# Altium PCB Sheet1.PcbDoc
Units mm, origin at the board's own origin, x right, y up, seen from the top; angles counter-clockwise.
Board outline 64.26 x 58.22 mm, 2 copper layers (Top Layer, Bottom Layer); 40 components, 36 nets, 240 pads, 0 vias.
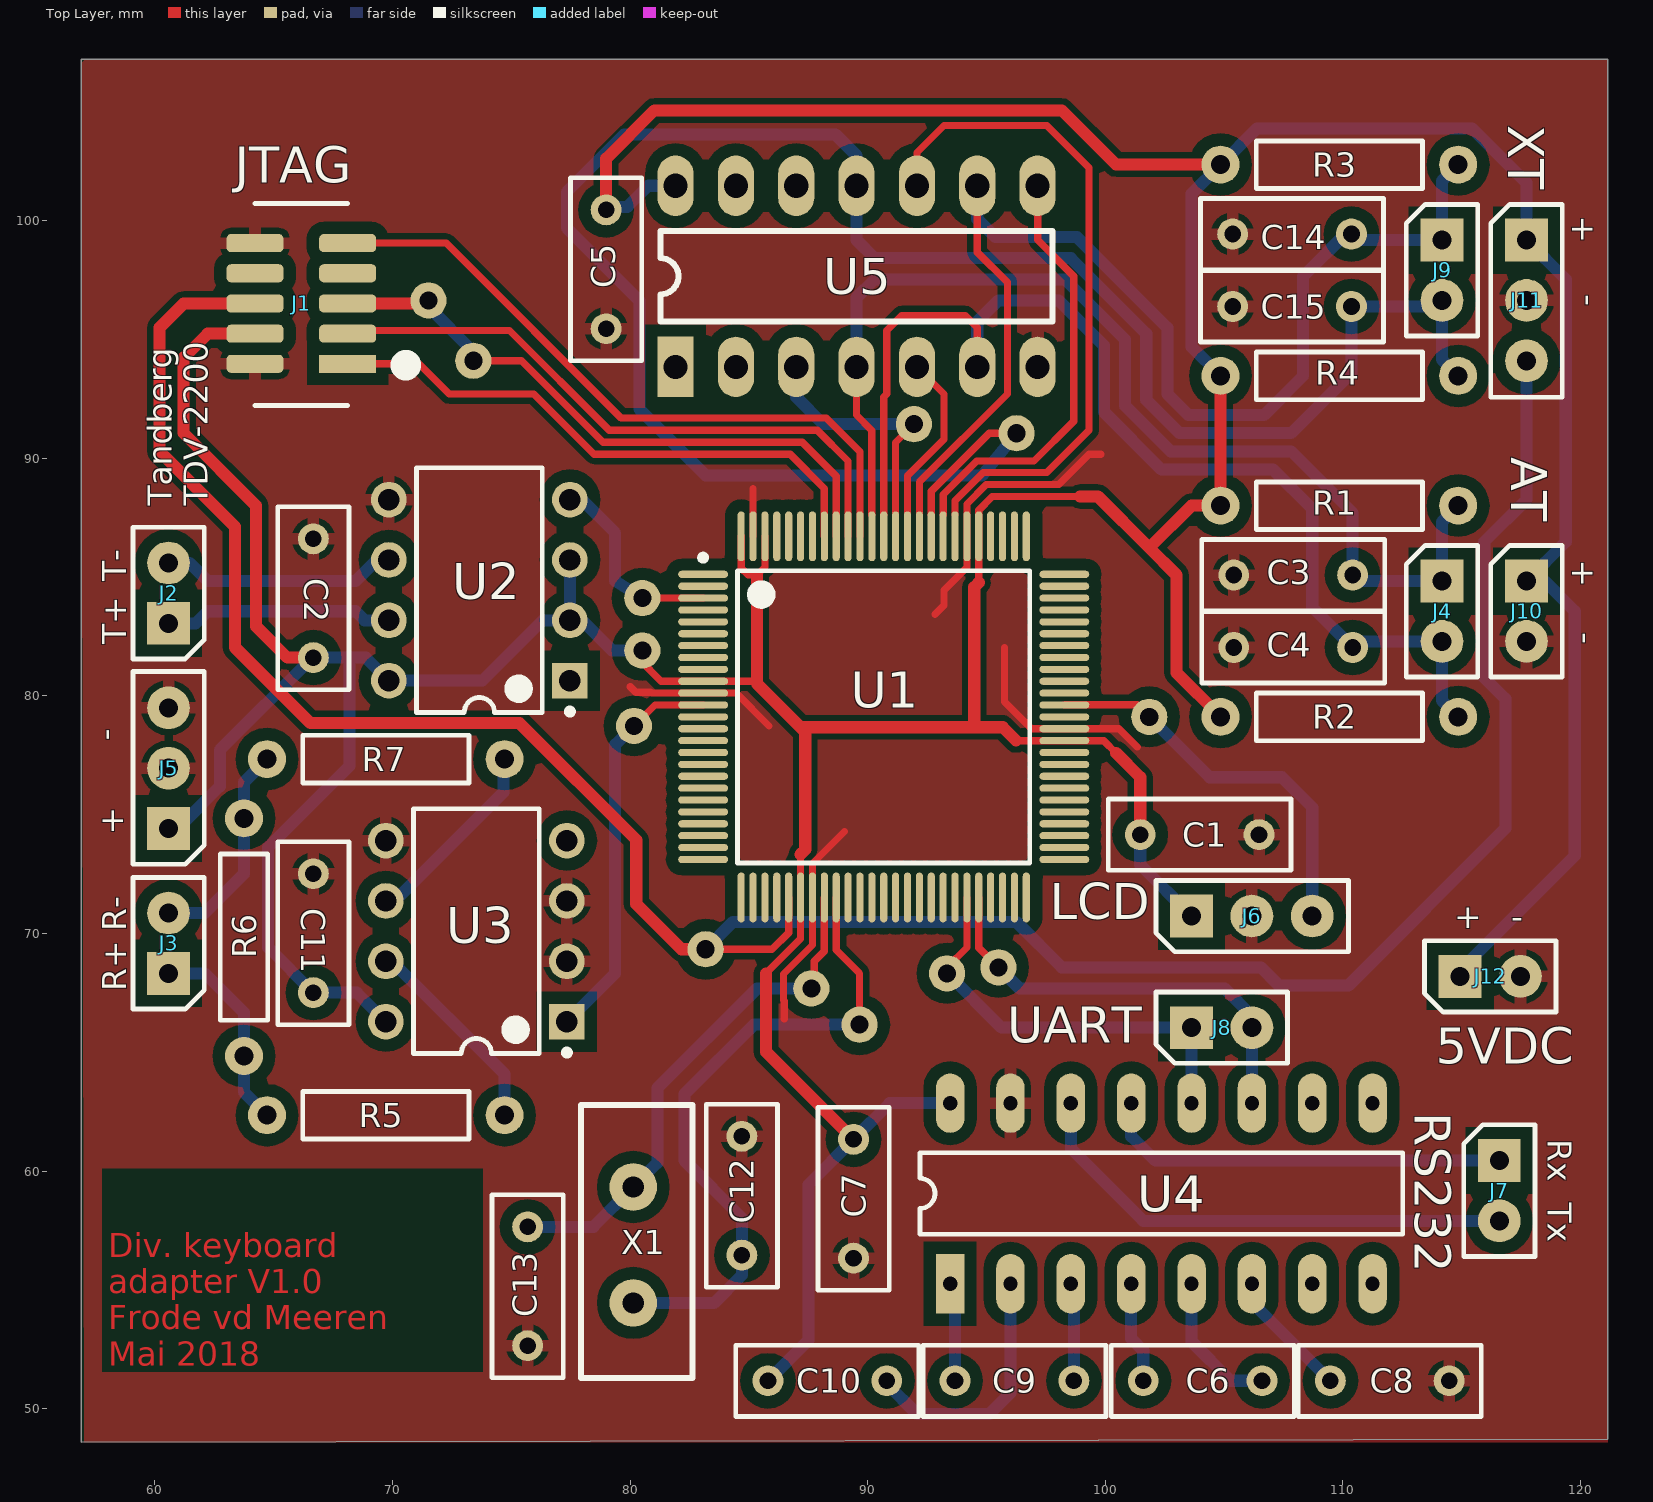
[diagram p0: Top Layer view]
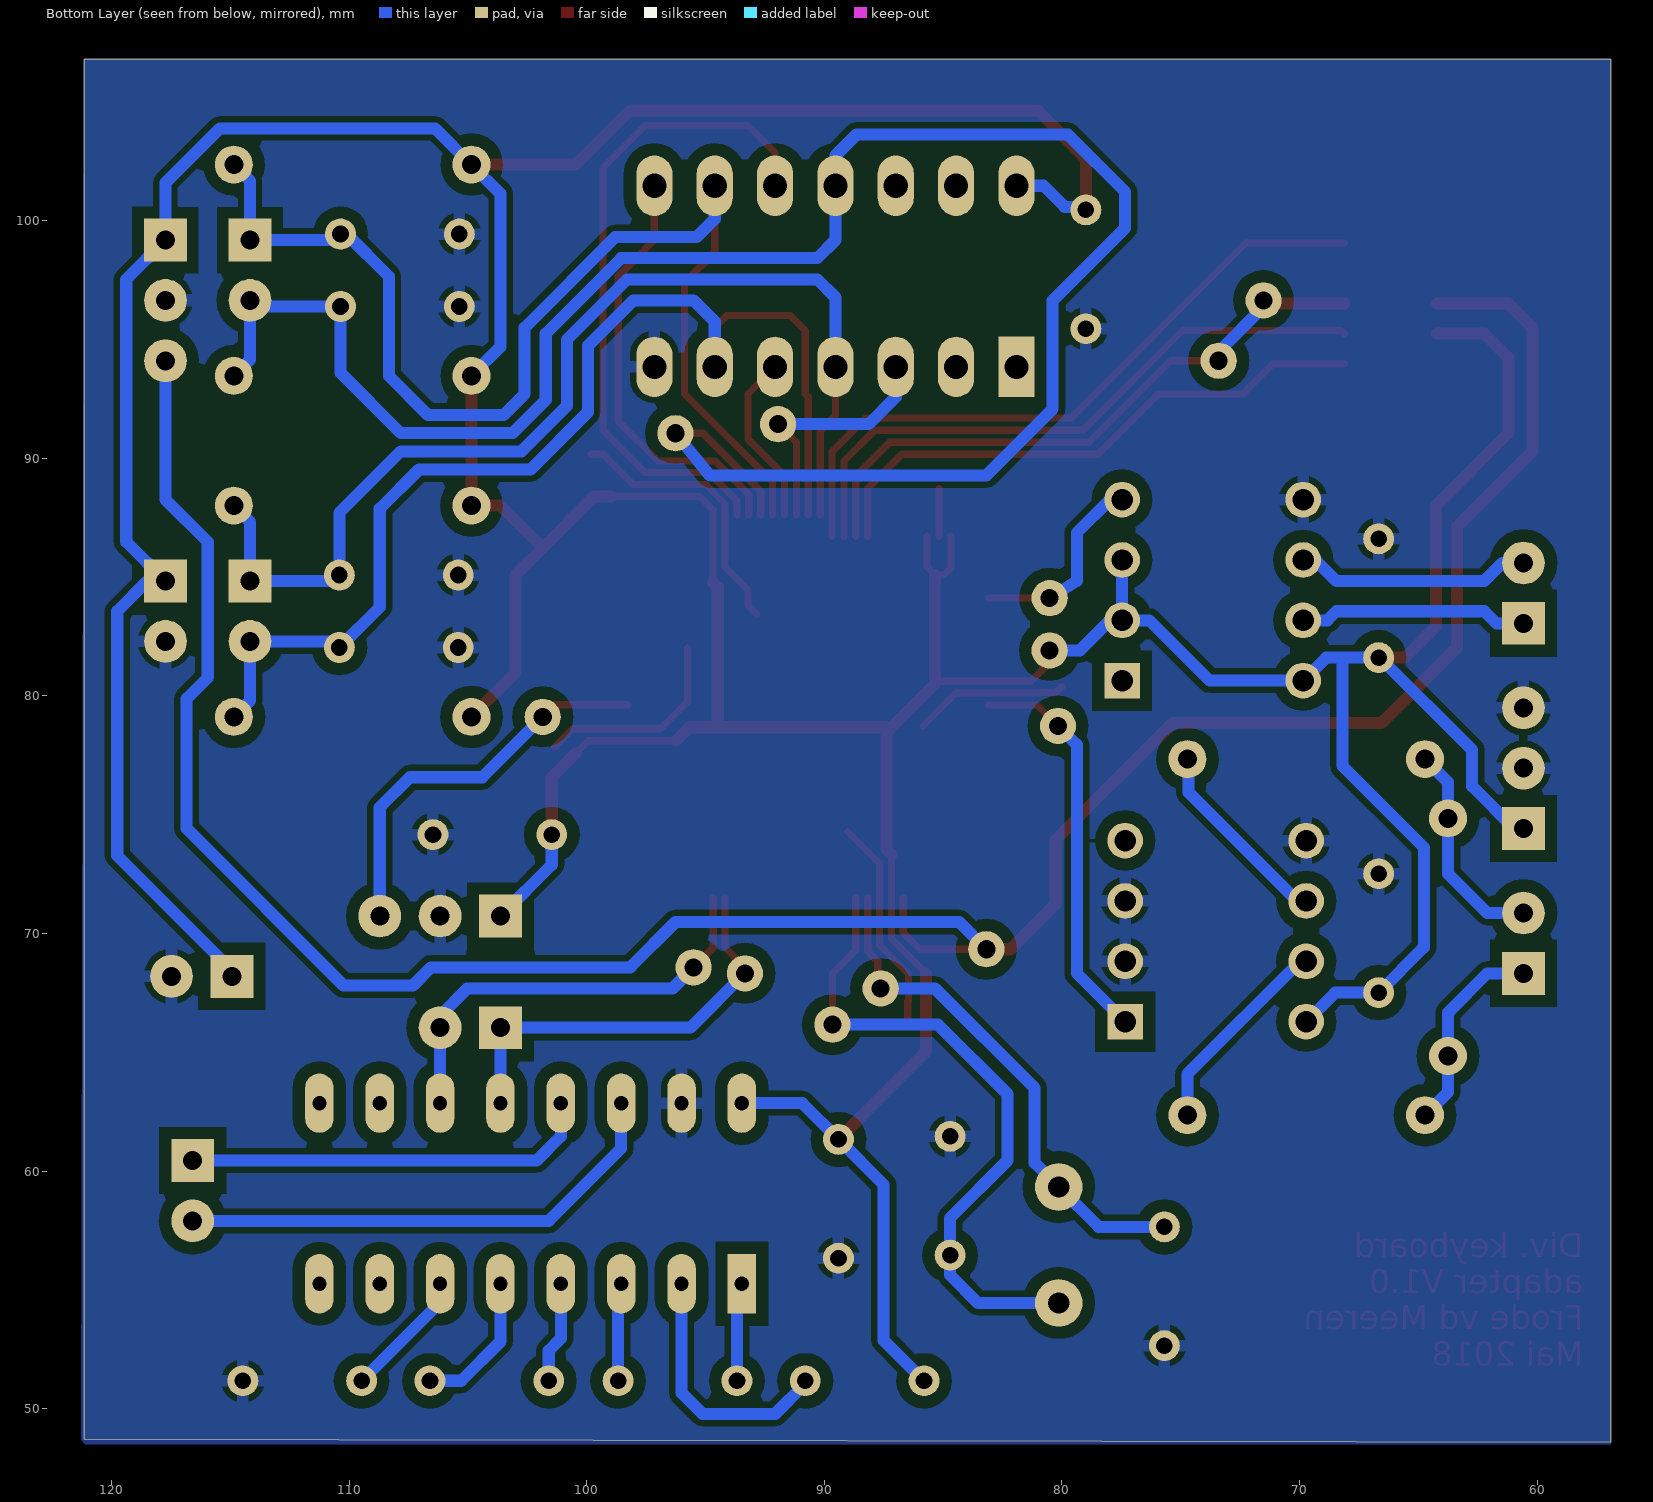
[diagram p1: Bottom Layer view, seen from below]
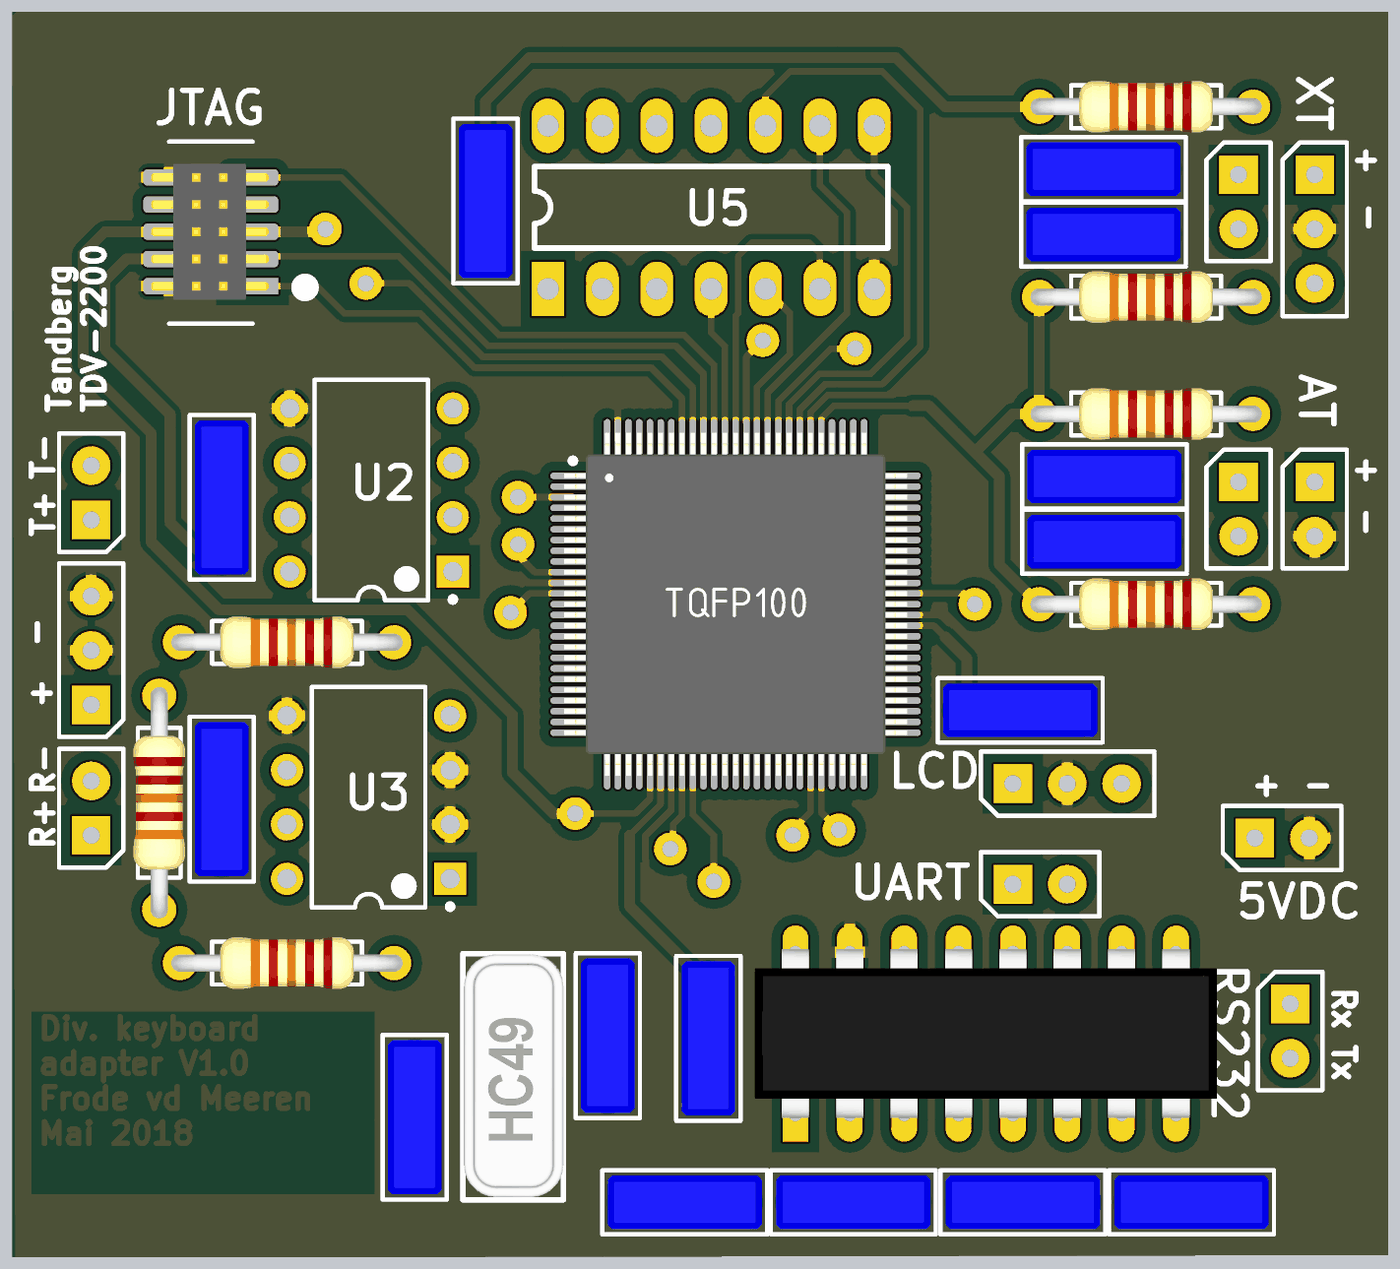
[diagram p2: 3D render of the assembled board from above, using the file's embedded part models]

## Layer stack, top to bottom
Top Solder: solder mask 0.0102, Solder Resist, Dk 3.5
Top Layer: signal copper 0.0356
Dielectric 1: dielectric 0.32, FR-4, Dk 4.8
Bottom Layer: signal copper 0.0356
Bottom Solder: solder mask 0.0102, Solder Resist, Dk 3.5

## Board outline
121.158,106.807 56.896,106.807 56.896,48.585 121.158,48.718

## Design rules (kind name [scope] priority, off if disabled: settings)
Clearance [All] p1: gap=0.254 ignorepadtopadclearanceinfootprint=FALSE except(0: Arc-Hole Track-Hole SMDPad-Hole THPad-Hole Via-Hole Fill-Hole Poly-Hole Region-Hole Text-Hole; 0.025: Track-Track Track-SMDPad SMDPad-SMDPad; 0.508: SMDPad-Poly THPad-Poly)
PolygonConnect [All] p1: connectstyle=Relief reliefconductorwidth=0.508 reliefentries=4 polygonreliefangle="90 Angle" airgapwidth=0.254
RoomDefinition Sheet1 [InComponentClass('Sheet1')] p1: confinementstyle=ConfineIn formatcopy=TRUE lockcomponents=FALSE outline 0,0 50.8,0 50.8,25.4 0,25.4
RoutingVias [All] p1: holewidth=0.711 width=1.27 viastyle="Through Hole" minholewidth=0.711 minwidth=1.27 maxholewidth=0.711 maxwidth=1.27
SolderMaskExpansion [All] p1: expansion=0.102
Width [All] p1: maxlimit=2.54 minlimit=0.305 preferedwidth=0.305
30 further rules are at their usual default settings.

## Components (designator, comment, footprint, x,y, rotation, side; value= is the part's Value field where it differs from the comment)
C1 "100nF" CAPAR500W50L730T250H650 106.473,74.168 r180 top
C2 "100nF" CAPAR500W50L730T250H650 66.675,86.614 r270 top
C3 "47pF" CAPAR500W50L730T250H650 105.41,85.09 r0 top
C4 "47pF" CAPAR500W50L730T250H650 105.41,82.042 r0 top
C5 "100nF" CAPAR500W50L730T250H650 78.994,95.457 r90 top
C6 "100nF" CAPAR500W50L730T250H650 101.6,51.181 r0 top
C7 "100nF" CAPAR500W50L730T250H650 89.408,56.341 r90 top
C8 "100nF" CAPAR500W50L730T250H650 109.474,51.181 r0 top
C9 "100nF" CAPAR500W50L730T250H650 93.679,51.181 r0 top
C10 "100nF" CAPAR500W50L730T250H650 85.805,51.181 r0 top
C11 "100nF" CAPAR500W50L730T250H650 66.675,72.517 r270 top
C12 "22pF" CAPAR500W50L730T250H650 84.709,56.468 r90 top
C13 "22pF" CAPAR500W50L730T250H650 75.692,57.658 r270 top
C14 "47pF" CAPAR500W50L730T250H650 105.363,99.441 r0 top
C15 "47pF" CAPAR500W50L730T250H650 105.363,96.393 r0 top
J1 "Header SMD 127 2x5" SMDHDRV10P127_2X5_615X330X560B 66.167,96.52 r180 top
J2 "Header 1x2" HDRV2W64P254_1X2_508X254X900B 60.579,85.598 r180 top
J3 "Header 1x2" HDRV2W64P254_1X2_508X254X900B 60.579,70.866 r180 top
J4 "Header 1x2" HDRV2W64P254_1X2_508X254X900B 114.173,82.296 r0 top
J5 "Header1x3" HDRV3W64P254_1X3_762X254X900B 60.579,76.962 r180 top
J6 "Header1x3" HDRV3W64P254_1X3_762X254X900B 106.172,70.739 r90 top
J7 "Header 1x2" HDRV2W64P254_1X2_508X254X900B 116.586,57.912 r0 top
J8 "Header 1x2" HDRV2W64P254_1X2_508X254X900B 106.172,66.04 r90 top
J9 "Header 1x2" HDRV2W64P254_1X2_508X254X900B 114.173,96.647 r0 top
J10 "Header 1x2" HDRV2W64P254_1X2_508X254X900B 117.729,82.296 r0 top
J11 "Header1x3" HDRV3W64P254_1X3_762X254X900B 117.729,96.647 r0 top
J12 "Header 1x2" HDRV2W64P254_1X2_508X254X900B 117.475,68.199 r90 top
R1 "10k" RESA_0.25W 109.855,88.011 r180 top
R2 "10k" RESA_0.25W 109.855,79.121 r180 top
R3 "10k" RESA_0.25W 109.855,102.362 r180 top
R4 "10k" RESA_0.25W 109.855,93.472 r180 top
R5 "1500" RESA_0.25W 69.723,62.357 r180 top
R6 "220" RESA_0.25W 63.754,69.85 r270 top
R7 "1500" RESA_0.25W 69.723,77.343 r180 top
U1 "ATMEGA640_1280_2560" TQFP100_M 90.678,79.121 r0 top
U2 "MAX485" DIP-8 73.66,84.455 r180 top
U3 "MAX485" DIP-8 73.533,70.104 r180 top
U4 "MAX232A" CircuitWorks-DIP16 93.472,55.265 r90 top
U5 "74LS07" DIP14 89.535,97.663 r90 top
X1 "Krystalloscillator" CrystalTH 80.137,56.896 r90 top

## Footprints (in the part's own frame and the unit in brackets; to place one, negate y for a bottom-side part, rotate by r counter-clockwise, add the part's x,y. Pads: shape width x height; smd on the part's side, far side on the other; paste and mask are expansions set on the pad)
CAPAR500W50L730T250H650 [mm] "Lead Spacing=5.0mm, Lead Width=0.5mm, Body Length=7.3mm, Body thickness=2.5mm, Body Height=6.5mm"
  round 1.3 hole 0.7: 1(0,0) 2(5,0)
  silkscreen extent -1.35,-1.5 6.35,1.5, body extent -1.1,-1.25 6.1,1.25, height 6.5
CircuitWorks-DIP16 [mm]
  rect 2.5x1.2 hole 0.6: 1(0,0)
  oval 2.5x1.2 hole 0.6: 2(0,-2.54) 3(0,-5.08) 4(0,-7.62) 5(0,-10.16) 6(0,-12.7) 7(0,-15.24) 8(0,-17.78) 9(7.6,-17.78) 10(7.6,-15.24) 11(7.6,-12.7) 12(7.6,-10.16) 13(7.6,-7.62) 14(7.6,-5.08) 15(7.6,-2.54) 16(7.6,0)
  silkscreen extent 2.08,-19.05 5.52,1.27, body extent -0.13,-19.68 7.75,1.91, height 4.19
CrystalTH [mm] "CrystalTH"
  round 2 hole 0.9: 1(-2.44,0) 2(2.44,0)
  silkscreen extent -5.6,-2.5 5.9,2.2, body extent -5.47,-2.5 5.87,2.15, height 3.6
DIP14 [mil]
  rect 100x60 hole 40: 1(-150,300)
  oval 100x60 hole 40: 2(-150,200) 3(-150,100) 4(-150,0) 5(-150,-100) 6(-150,-200) 7(-150,-300) 8(150,-300) 9(150,-200) 10(150,-100) 11(150,0) 12(150,100) 13(150,200) 14(150,300)
  silkscreen extent -75,-325 75,325
DIP-8 [mm] "DIP; 8 Leads; Row Spacing 7.62 mm; Pitch 2.54 mm"
  rect 1.5x1.5 hole 0.9: 1(-3.81,3.81)
  round 1.5 hole 0.9: 2(-3.81,1.27) 3(-3.81,-1.27) 4(-3.81,-3.81) 5(3.81,-3.81) 6(3.81,-1.27) 7(3.81,1.27) 8(3.81,3.81)
  silkscreen extent -3.94,-5.15 2.65,5.23, body extent -3.6,-5.15 3.6,5.15, height 5.08
HDRV2W64P254_1X2_508X254X900B [mm] "Header 1x2"
  rect 1.8x1.8 hole 0.8: 1(0,2.54)
  round 1.8 hole 0.8: 2(0,0)
  silkscreen extent -1.5,-1.5 1.5,4.04
HDRV3W64P254_1X3_762X254X900B [mm] "Header 1x3"
  rect 1.8x1.8 hole 0.8: 1(0,2.54)
  round 1.8 hole 0.8: 2(0,0) 3(0,-2.54)
  silkscreen extent -1.5,-4.07 1.5,4.04
RESA_0.25W [mm]
  round 1.6 hole 0.8: 1(-5,0) 2(5,0)
  silkscreen extent -3.5,-1 3.5,1, body extent -5.4,-1.2 5.4,1.2, height 2.6
SMDHDRV10P127_2X5_615X330X560B [mm] "SMD 2X5 Vertical Header"
  rect 2.4x0.76 smd: 1(-1.95,2.54)
  rrect50% 2.4x0.76 smd: 2(1.95,2.54) 3(-1.95,1.27) 4(1.95,1.27) 5(-1.95,0) 6(1.95,0) 7(-1.95,-1.27) 8(1.95,-1.27) 9(-1.95,-2.54) 10(1.95,-2.54)
  silkscreen extent -4.54,-4.21 1.95,4.29, body extent -2.7,-3.18 2.8,3.17, height 4.5
TQFP100_M [mm]
  oval 2.1x0.3 smd: 1(-7.6,6) 2(-7.6,5.5) 3(-7.6,5) 4(-7.6,4.5) 5(-7.6,4) 6(-7.6,3.5) 7(-7.6,3) 8(-7.6,2.5) 9(-7.6,2) 10(-7.6,1.5) 11(-7.6,1) 12(-7.6,0.5) 13(-7.6,0) 14(-7.6,-0.5) 15(-7.6,-1) 16(-7.6,-1.5) 17(-7.6,-2) 18(-7.6,-2.5) 19(-7.6,-3) 20(-7.6,-3.5) 21(-7.6,-4) 22(-7.6,-4.5) 23(-7.6,-5) 24(-7.6,-5.5) 25(-7.6,-6) 51(7.6,-6) 52(7.6,-5.5) 53(7.6,-5) 54(7.6,-4.5) 55(7.6,-4) 56(7.6,-3.5) 57(7.6,-3) 58(7.6,-2.5) 59(7.6,-2) 60(7.6,-1.5) 61(7.6,-1) 62(7.6,-0.5) 63(7.6,0) 64(7.6,0.5) 65(7.6,1) 66(7.6,1.5) 67(7.6,2) 68(7.6,2.5) 69(7.6,3) 70(7.6,3.5) 71(7.6,4) 72(7.6,4.5) 73(7.6,5) 74(7.6,5.5) 75(7.6,6)
  oval 0.3x2.1 smd: 26(-6,-7.6) 27(-5.5,-7.6) 28(-5,-7.6) 29(-4.5,-7.6) 30(-4,-7.6) 31(-3.5,-7.6) 32(-3,-7.6) 33(-2.5,-7.6) 34(-2,-7.6) 35(-1.5,-7.6) 36(-1,-7.6) 37(-0.5,-7.6) 38(0,-7.6) 39(0.5,-7.6) 40(1,-7.6) 41(1.5,-7.6) 42(2,-7.6) 43(2.5,-7.6) 44(3,-7.6) 45(3.5,-7.6) 46(4,-7.6) 47(4.5,-7.6) 48(5,-7.6) 49(5.5,-7.6) 50(6,-7.6) 76(6,7.6) 77(5.5,7.6) 78(5,7.6) 79(4.5,7.6) 80(4,7.6) 81(3.5,7.6) 82(3,7.6) 83(2.5,7.6) 84(2,7.6) 85(1.5,7.6) 86(1,7.6) 87(0.5,7.6) 88(0,7.6) 89(-0.5,7.6) 90(-1,7.6) 91(-1.5,7.6) 92(-2,7.6) 93(-2.5,7.6) 94(-3,7.6) 95(-3.5,7.6) 96(-4,7.6) 97(-4.5,7.6) 98(-5,7.6) 99(-5.5,7.6) 100(-6,7.6)
  silkscreen extent -7.72,-6.15 6.15,6.82, body extent -8.01,-8.01 8.01,8.01, height 1.1

## Part data
C1 C2 C3 C4 C5 C6 C7 C8 C9 C10 C11 C12 C13 C14 C15: library part 3269, "100V plast", antall=200, dybde=1, hylle=4, id=3269, kolonne=0, lager_type=Fremlager, leverandor=Farnell, leverandor_varenr=2525325, pakke_opprettet="16.11.2016 21:11:30", pakke_opprettet_av=1335, pakketype=TH, pris=2, rad=12, rom=OV, symbol_opprettet="14.11.2014 20:19:34", symbol_opprettet_av=815
  C1 C2 C5 C6 C7 C8 C9 C10 C11: navn=100nF
  C3 C4 C14 C15: navn=47pF
  C12 C13: navn=22pF
J1: library part 2449, antall=55, beskrivelse="1,27mm Pitch SMD Header", dybde=0, hylle=6, id=2449, kolonne=0, lager_type=Fremlager, navn="Header SMD 127 2x5", nokkelord=JTAG, pakke_opprettet="15.11.2014 18:30:38", pakke_opprettet_av=815, pakketype=SMD, pris=20, rad=4, rom=OV, symbol_opprettet="15.11.2014 18:33:29", symbol_opprettet_av=815
J2 J3 J4 J7 J8 J9 J10 J12: library part 2429, beskrivelse="2,54mm pitch", id=2429, navn="Header 1x2", pakke_opprettet="13.11.2014 12:30:48", pakke_opprettet_av=815, pakketype=TH, pris=1, symbol_opprettet="13.11.2014 10:58:53", symbol_opprettet_av=815
J5 J6 J11: library part 2430, beskrivelse="2,54mm pitch", id=2430, navn="Header 1x3", pakke_opprettet="13.11.2014 12:31:03", pakke_opprettet_av=815, pakketype=TH, pris=2, symbol_opprettet="13.11.2014 10:59:05", symbol_opprettet_av=815
R1 R2 R3 R4 R5 R6 R7: library part 2807, "0.25W 1% Generic resistor", antall=250, dybde=16, hylle=0, id=2807, kolonne=0, lager_type=Baklager, nokkelord="Motstand, Resistor", pakke_opprettet="28.06.2014 17:13:33", pakke_opprettet_av=815, pakketype=TH, pris=0, rad=14, rom=GM, symbol_opprettet="08.07.2014 21:16:33", symbol_opprettet_av=815
  R1 R2 R3 R4: navn=10k
  R5 R7: navn=1500
  R6: navn=220
U2 U3: library part 3048, "3.3V-Powered, 10Mbps and Slew-Rate-Limited True RS-485/RS-422 Transceivers", antall=40, dybde=0, hylle=2, id=3048, kolonne=4, lager_type=Fremlager, leverandor=Farnell, leverandor_varenr=1296640, navn=MAX485, nokkelord=RS485, pakke_opprettet="28.06.2014 18:39:37", pakke_opprettet_av=815, pakketype=SOIC, pris=22, produsent=Exar, rad=4, rom=OV, symbol_opprettet="07.05.2015 21:29:51", symbol_opprettet_av=815
U4: library part 2080, "rs232 -> ttl converter", id=2080, navn=MAX232A, pakke_opprettet="25.08.2016 00:00:22", pakke_opprettet_av=1607, pakketype=DIP, pris=5, symbol_opprettet="14.09.2016 15:58:47", symbol_opprettet_av=1154
U5: library part 74LS04
X1: library part 3915, "4MHz", antall=30, dybde=0, hylle=7, id=3915, lager_type=Fremlager, navn=Krystalloscillator, nokkelord="krystall, crystal, oscillator", pakke_opprettet="29.01.2017 21:01:52", pakke_opprettet_av=1150, pakketype=TH, pris=2, rad=0, rom=OV, symbol_opprettet="23.08.2014 20:23:20", symbol_opprettet_av=774

## Free pads (board coordinates)
  round 1.524 hole 0.762: 2(87.63,67.691) 3(89.662,66.167) 4(101.854,79.121) 5(93.345,68.326) 6(95.504,68.58) 7(80.168,78.74) 8(80.518,84.121) 14(91.948,91.44) 15(96.266,91.059) 16(73.406,94.107) 17(71.519,96.647) 18(83.185,69.342) 20(80.518,81.915)

## Nets (pads, with @x,y where several pads share a name; then routed paths per layer and width w, separated by ;. In a path a pad name is that pad's centre, name@x,y a point inside that pad or via, vN(x,y) a via of type N, cw(c..) or ccw(c..) an arc to the next point about the centre after c; other vN are vias at no path point)
GND: C1.1 C2.1 C3.1 C4.1 C5.1 C7.1 C8.2 C11.1 C12.2 C13.2 C14.1 C15.1 J1.2 J1.10 J5.2 J5.3 J6.2 J10.2 J11.2 J12.2 U1.11 U1.32 U1.62 U1.81 U1.99 U2.5 U3.2 U3.3 U3.5 U4.15 U5.7 | length 37.9
  Top Layer w0.305: 80.01,80.391 80.239,80.162 80.864,80.162 80.905,80.121 U1.11 84.471,80.121 85.852,78.74 ; U1.99 85.178,88.734 ; 86.487,66.421 86.487,67.156 86.462,67.182 86.462,68.301 87.678,69.517 U1.32 87.678,72.946 89.027,74.295 ; 92.837,83.439 93.218,83.82 93.218,84.455 94.178,85.415 U1.81 94.178,88.082 94.996,88.9 98.044,88.9 99.314,90.17 99.822,90.17 ; 95.758,82.042 95.758,79.756 96.893,78.621 U1.62 100.576,78.621 101.346,77.851
NetC3_2: C3.2 J4.1 R1.1 U1.89 U5.4 | length 46.3
  Top Layer w0.305: U5.4@89.535,94.107 U5.4 89.535,91.821 90.178,91.178 U1.89@90.178,87.63
  Bottom Layer w0.508: U5.4@89.535,94.107 89.535,96.774 90.297,97.536 98.298,97.536 100.838,94.996 100.838,92.202 102.743,90.297 107.823,90.297 110.41,87.71 C3.2 110.664,84.836 J4.1 114.173,87.329 R1.1
NetC4_2: C4.2 J4.2 R2.1 U1.88 U5.6 | length 48.7
  Top Layer w0.305: U1.88@90.678,87.63 90.678,92.583 90.805,92.71 90.805,95.377 91.44,96.012 94.107,96.012 94.615,95.504 U5.6@94.615,94.107
  Bottom Layer w0.508: U5.6@94.615,94.107 94.615,95.758 95.504,96.647 98.044,96.647 99.949,94.742 99.949,91.948 102.362,89.535 107.061,89.535 108.712,87.884 108.712,83.74 C4.2 110.664,82.296 J4.2 114.173,79.803 R2.1
NetC6_1: C6.1 U4.4 | length 4.3
  Bottom Layer w0.508: U4.4 101.092,52.959 101.6,52.451 C6.1
NetC6_2: C6.2 U4.5 | length 6.1
  Bottom Layer w0.508: U4.5 103.632,52.832 105.283,51.181 C6.2
NetC8_1: C8.1 U4.6 | length 5.5
  Bottom Layer w0.508: U4.6 106.172,54.483 C8.1
NetC9_1: C9.1 U4.1 | length 4.2
  Bottom Layer w0.508: U4.1 93.679,55.058 C9.1
NetC9_2: C9.2 U4.3 | length 4.1
  Bottom Layer w0.508: U4.3 98.679,55.138 C9.2
NetC10_2: C10.2 U4.2 | length 10.8
  Bottom Layer w0.508: C10.2 90.805,51.054 92.075,49.784 95.123,49.784 96.012,50.673 U4.2
NetC12_1: C12.1 pad.3 U1.34 X1.1 | length 28
  Top Layer w0.305: U1.34 88.678,69.31 89.662,68.326 pad.3
  Bottom Layer w0.508: X1.1 83.539,54.456 84.709,55.626 C12.1 84.709,58.039 82.296,60.452 82.296,63.246 85.217,66.167 pad.3
NetC13_1: C13.1 pad.2 U1.33 X1.2 | length 22
  Top Layer w0.305: pad.2 87.757,67.818 87.757,68.834 88.178,69.255 U1.33
  Bottom Layer w0.508: C13.1 78.459,57.658 X1.2 81.153,60.352 81.153,63.5 85.344,67.691 pad.2
NetC14_2: C14.2 J9.1 R3.1 U1.85 U5.9 | length 51.6
  Top Layer w0.305: U1.85@92.178,87.63 92.178,89.003 95.885,92.71 95.885,97.409 94.615,98.679 U5.9 U5.9@94.615,101.727
  Bottom Layer w0.508: U5.9@94.615,101.727 U5.9 94.615,100.076 95.377,99.314 98.806,99.314 102.616,95.504 102.616,92.71 103.505,91.821 106.68,91.821 108.331,93.472 108.331,97.663 110.109,99.441 C14.2 110.617,99.187 J9.1 114.173,101.68 R3.1
NetC15_2: C15.2 J9.2 pad.15 R4.1 U1.84 U5.11 | length 88
  Top Layer w0.305: U1.84@92.678,87.63 92.678,88.614 95.123,91.059 pad.15
  Bottom Layer w0.508: pad.15 94.82,89.281 83.185,89.281 80.391,92.075 80.391,96.647 77.343,99.695 77.343,101.219 79.756,103.632 88.646,103.632 89.535,102.743 U5.11 89.535,99.187 90.297,98.425 98.552,98.425 101.727,95.25 101.727,92.456 103.124,91.059 107.823,91.059 110.363,93.599 C15.2 113.919,96.393 J9.2 114.173,94.154 R4.1
NetJ1_1: J1.1 U1.93 | length 24.2
  Top Layer w0.305: J1.1 71.12,93.98 72.39,92.71 75.946,92.71 78.486,90.17 86.741,90.17 88.178,88.733 U1.93
NetJ1_3: J1.3 U1.91 | length 26.6
  Top Layer w0.305: J1.3 68.244,95.377 74.93,95.377 79.121,91.186 87.884,91.186 89.178,89.892 U1.91
NetJ1_5: J1.5 pad.16 pad.17 U1.92 | length 26.4
  Top Layer w0.305: pad.17@70.866,96.52 pad.17 ; pad.16@73.66,94.361 73.914,94.107 75.438,94.107 78.867,90.678 87.249,90.678 88.678,89.249 U1.92
  Top Layer w0.508: J1.5 pad.17@70.866,96.52
  Bottom Layer w0.508: pad.17 71.519,96.375 73.406,94.488 pad.16
NetJ1_6: J1.6 J11.3 pad.18 U1.30 | length 109.9
  Top Layer w0.305: pad.18 85.979,69.342 86.678,70.041 U1.30
  Top Layer w0.508: J1.6 61.214,96.52 60.198,95.504 60.198,90.297 63.373,87.122 63.373,82.042 66.548,78.867 75.341,78.867 80.264,73.944 80.264,71.247 82.169,69.342 pad.18
  Bottom Layer w0.508: pad.18 84.328,70.485 96.266,70.485 98.171,68.58 106.553,68.58 107.315,67.818 110.236,67.818 116.84,74.422 116.84,79.883 115.951,80.772 115.951,86.487 117.729,88.265 J11.3
NetJ1_9: J1.9 U1.90 | length 28.8
  Top Layer w0.305: J1.9 72.263,99.06 79.629,91.694 88.265,91.694 89.678,90.281 U1.90
NetJ2_1: J2.1 U2.7 | length 9.6
  Bottom Layer w0.508: J2.1 61.722,83.058 62.23,83.566 68.453,83.566 68.834,83.185 U2.7
NetJ2_2: J2.2 U2.6 | length 10
  Bottom Layer w0.508: J2.2 61.468,85.598 62.23,84.836 68.453,84.836 69.342,85.725 U2.6
NetJ3_1: J3.1 R5.2 R6.2 | length 8.6
  Bottom Layer w0.508: J3.1 62.103,68.326 63.754,66.675 R6.2 63.754,63.326 R5.2
NetJ3_2: J3.2 R6.1 R7.2 | length 9.1
  Bottom Layer w0.508: J3.2 62.103,70.866 63.754,72.517 R6.1 63.754,76.374 R7.2
NetJ6_3: J6.3 pad.4 U1.64 | length 16.8
  Top Layer w0.305: U1.64 98.286,79.629 101.346,79.629 pad.4
  Bottom Layer w0.508: pad.4 104.394,76.581 107.442,76.581 108.712,75.311 J6.3
NetJ7_1: J7.1 U4.13 | length 17.3
  Bottom Layer w0.508: U4.13 101.092,61.468 102.108,60.452 J7.1
NetJ7_2: J7.2 U4.14 | length 21.2
  Bottom Layer w0.508: U4.14 98.552,60.96 101.6,57.912 J7.2
NetJ8_1: J8.1 pad.5 U1.45 U4.12 | length 17.9
  Top Layer w0.305: pad.5 93.345,68.58 94.178,69.413 U1.45
  Bottom Layer w0.508: pad.5 95.631,66.04 J8.1 U4.12
NetJ8_2: J8.2 pad.6 U1.46 U4.11 | length 18.8
  Top Layer w0.305: U1.46 94.678,69.406 pad.6
  Bottom Layer w0.508: pad.6@95.758,68.453 pad.6 96.393,67.691 105.029,67.691 106.172,66.548 J8.2 U4.11
NetR5_1: R5.1 U3.7 | length 8.7
  Bottom Layer w0.508: U3.7 69.977,68.834 74.723,64.088 R5.1
NetR7_1: R7.1 U3.6 | length 8.3
  Bottom Layer w0.508: U3.6 70.104,71.374 74.676,75.946 74.676,77.296 R7.1
NetU1_3: pad.8 U1.3 U2.4 | length 8.9
  Top Layer w0.305: pad.8@80.09,84.121 pad.8 U1.3
  Bottom Layer w0.508: U2.4 77.978,88.265 79.375,86.868 79.375,84.836 pad.8
NetU1_12: pad.7 U1.12 U3.1 | length 16.9
  Top Layer w0.305: pad.7 81.049,79.621 U1.12
  Bottom Layer w0.508: U3.1 79.375,68.326 79.375,77.947 pad.7
NetU1_82: U1.82 U5.10 | length 28.2
  Top Layer w0.305: U5.10@92.075,102.362 92.075,102.87 93.218,104.013 97.536,104.013 99.314,102.235 99.314,91.186 97.536,89.408 94.869,89.408 93.678,88.217 U1.82@93.678,87.63
  Top Layer w0.381: U5.10@92.075,101.727 91.948,101.854 91.948,102.235 U5.10@92.075,102.362
NetU1_83: U1.83 U5.8 | length 18.4
  Top Layer w0.305: U1.83@93.178,87.63 93.178,88.479 94.59,89.891 97.003,89.891 98.679,91.567 98.679,97.663 97.155,99.187 U5.8 U5.8@97.155,101.727
NetU1_86: U1.86 U5.5 | length 7.6
  Top Layer w0.305: U1.86@91.678,87.63 91.678,89.265 93.218,90.805 93.218,92.71 U5.5
  Top Layer w0.381: U5.5 U5.5@92.075,94.107
  Bottom Layer w0.508: U5.5@92.202,94.1 U5.5@92.202,94.107
NetU1_87: pad.14 U1.87 U5.3 | length 11.1
  Top Layer w0.305: U1.87@91.178,87.63 91.178,90.67 pad.14
  Bottom Layer w0.508: U5.3@86.995,94.107 U5.3 86.995,92.583 88.138,91.44 pad.14
VCC: C1.2 C2.2 C5.2 C7.2 C10.1 C11.2 J1.4 J5.1 J6.1 J10.1 J11.1 J12.1 pad.20 R1.2 R2.2 R3.2 R4.2 U1.10 U1.31 U1.61 U1.80 U1.98 U1.100 U2.2 U2.3 U2.8 U3.8 U4.16 U5.14 | length 272.4
  Top Layer w0.305: pad.20@80.405,81.52 81.304,80.621 U1.10 85.241,80.621 85.344,80.518 ; U1.100 84.678,85.375 84.963,85.09 85.344,85.09 85.678,85.424 U1.98 ; 85.725,68.326 87.178,69.779 U1.31 87.178,73.335 ; 94.678,84.772 U1.80 94.678,87.82 95.25,88.392 98.933,88.392 ; 96.25,78.121 U1.61 99.933,78.121 100.457,77.597
  Top Layer w0.508: J1.4 62.23,95.25 61.214,94.234 61.214,91.059 64.262,88.011 64.262,82.931 65.579,81.614 C2.2 ; C5.2 78.994,102.616 81.026,104.648 98.171,104.648 100.457,102.362 R3.2 ; pad.20@80.405,81.52 pad.20 ; 85.344,85.09 85.344,80.518 87.178,78.684 ; 85.725,68.326 85.725,65.024 C7.2 ; 87.178,73.335 87.376,73.533 87.376,78.486 87.178,78.684 ; 94.678,84.772 94.488,84.582 94.488,78.684 ; 96.25,78.121 95.687,78.684 94.488,78.684 ; 98.933,88.392 99.695,88.392 101.854,86.233 ; 100.457,77.597 101.473,76.581 C1.2 ; R2.2 102.997,80.979 102.997,85.09 101.854,86.233 ; R4.2 R1.2 103.632,88.011 101.854,86.233 ; 87.178,78.684 94.488,78.684
  Bottom Layer w0.508: J5.1 60.96,74.422 62.738,76.2 62.738,77.724 66.628,81.614 C2.2 68.199,81.614 ; U3.8 68.5,67.517 C11.2 64.77,69.422 64.77,73.63 68.199,77.059 68.199,81.614 ; U2.3 U2.2 ; C5.2 79.121,100.584 79.883,100.584 80.772,101.473 U5.14 ; pad.20 79.248,81.915 77.978,83.185 U2.2 ; C10.1 87.503,52.879 87.503,59.436 C7.2 90.932,62.865 U4.16 ; C1.2 101.473,72.898 J6.1 ; R4.2 103.632,94.695 103.632,101.139 R3.2 106.379,103.886 115.443,103.886 117.729,101.6 J11.1 119.38,97.536 119.38,86.487 J10.1 118.491,84.836 119.761,83.566 119.761,73.279 J12.1@114.808,68.326 ; 68.199,81.614 68.881,81.614 U2.8 73.787,80.645 76.327,83.185 U2.2
pads on no net: J1.7 J1.8 U1.1 U1.2 U1.4 U1.5 U1.6 U1.7 U1.8 U1.9 U1.13 U1.14 U1.15 U1.16 U1.17 U1.18 U1.19 U1.20 U1.21 U1.22 U1.23 U1.24 U1.25 U1.26 U1.27 U1.28 U1.29 U1.35 U1.36 U1.37 U1.38 U1.39 U1.40 U1.41 U1.42 U1.43 U1.44 U1.47 U1.48 U1.49 U1.50 U1.51 U1.52 U1.53 U1.54 U1.55 U1.56 U1.57 U1.58 U1.59 U1.60 U1.63 U1.65 U1.66 U1.67 U1.68 U1.69 U1.70 U1.71 U1.72 U1.73 U1.74 U1.75 U1.76 U1.77 U1.78 U1.79 U1.94 U1.95 U1.96 U1.97 U2.1 U3.4 U4.7 U4.8 U4.9 U4.10 U5.1 U5.2 U5.12 U5.13

## Polygon pours and split planes (outlines as drawn)
GND on Top Layer "Top Layer-No Net" (solid, remove dead copper, pour order 0): 57.023,48.586 121.158,48.586 121.158,106.807 56.896,106.807
GND on Bottom Layer "Top Layer-No Net" (solid, remove dead copper, pour order 2): 56.896,106.807 121.158,106.807 121.285,48.514 56.896,48.514

## Other copper
Top Layer:
  text "Div. keyboard / adapter V1.0 / Frode vd Meeren / Mai 2018" at 58.039,51.816 h1.02

## Silkscreen, mask and mechanical layers (free items; w line width, h text height)
Top Overlay:
  text "XT" at 116.967,104.013 h1.52 r270
  text "JTAG" at 63.373,101.6 h1.52
  text "+" at 120.523,99.06 h1.02 r90
  text "-" at 120.65,96.393 h1.02 r90
  text "AT" at 117.094,90.043 h1.52 r270
  text "Tandberg / TDV-2200" at 62.23,88.011 h1.02 r90
  text "T-" at 58.801,84.836 h1.02 r90
  text "+" at 120.523,84.582 h1.02 r90
  text "T+" at 58.801,82.169 h1.02 r90
  text "-" at 120.523,82.169 h1.02 r90
  text "-" at 57.658,78.613 h1.02 r270
  text "+" at 58.674,74.168 h1.02 r90
  text "LCD" at 97.663,70.612 h1.52
  text "+" at 114.681,70.231 h1.02
  text "-" at 117.094,70.231 h1.02
  text "R-" at 58.801,70.104 h1.02 r90
  text "R+" at 58.801,67.564 h1.02 r90
  text "UART" at 95.885,65.405 h1.52
  text "5VDC" at 113.919,64.516 h1.52
  text "RS232" at 113.03,62.484 h1.52 r270
  text "Rx" at 118.618,61.341 h1.02 r270
  text "Tx" at 118.618,58.674 h1.02 r270